# Altium PCB Acoustic Signal Localization PCB.PcbDoc
Units mm, origin at the board's own origin, x right, y up, seen from the top; angles counter-clockwise.
Board outline 100 x 100 mm, 2 copper layers (Top Layer, Bottom Layer); 55 components, 31 nets, 145 pads, 102 vias.
Unrouted connection lines stored in the file: 1.
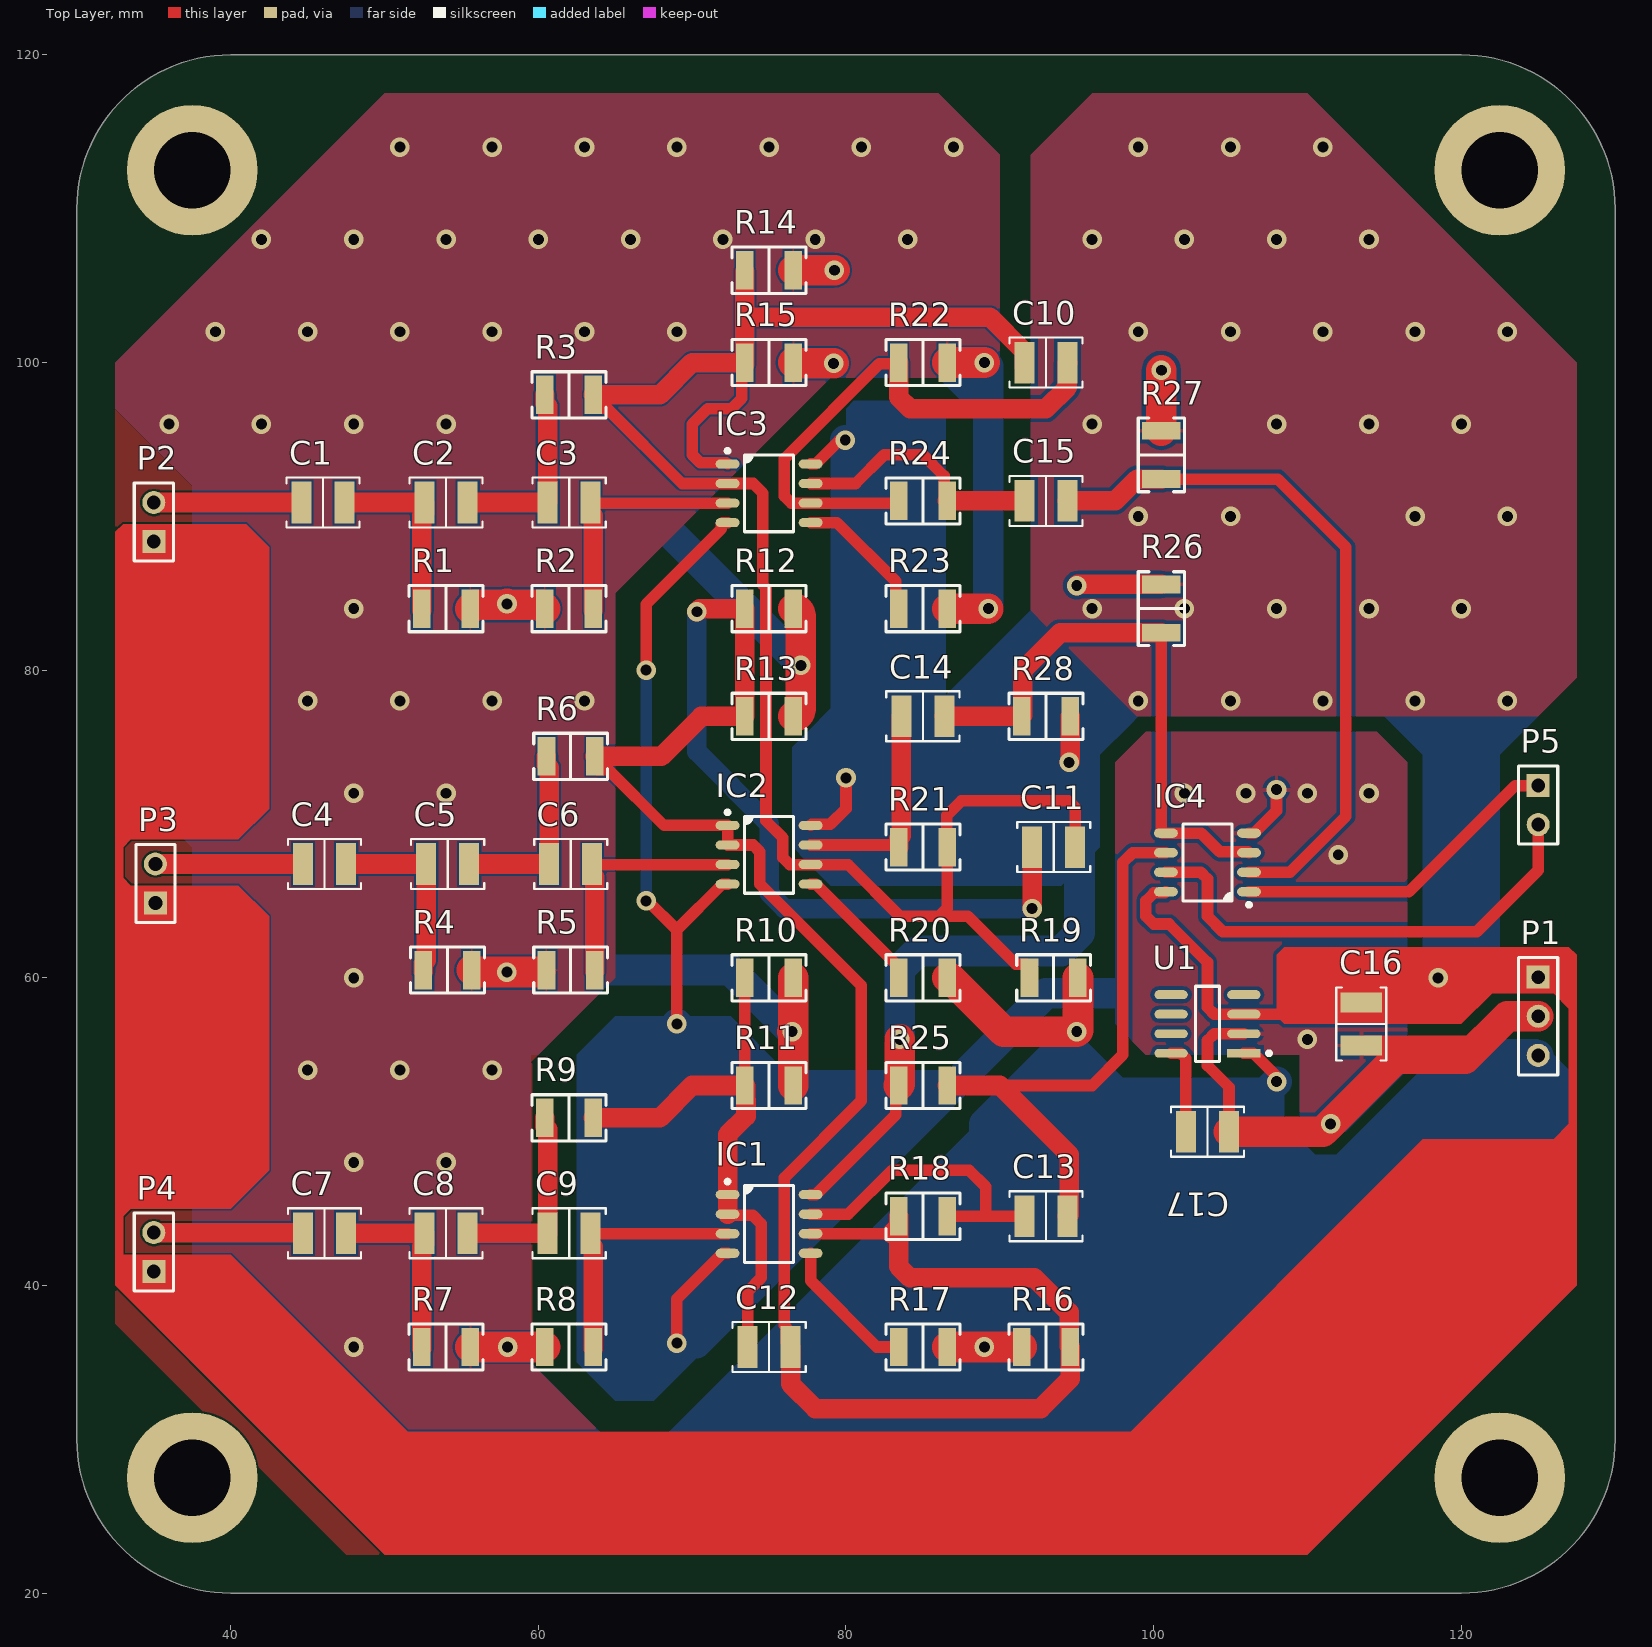
[diagram p0: Top Layer view]
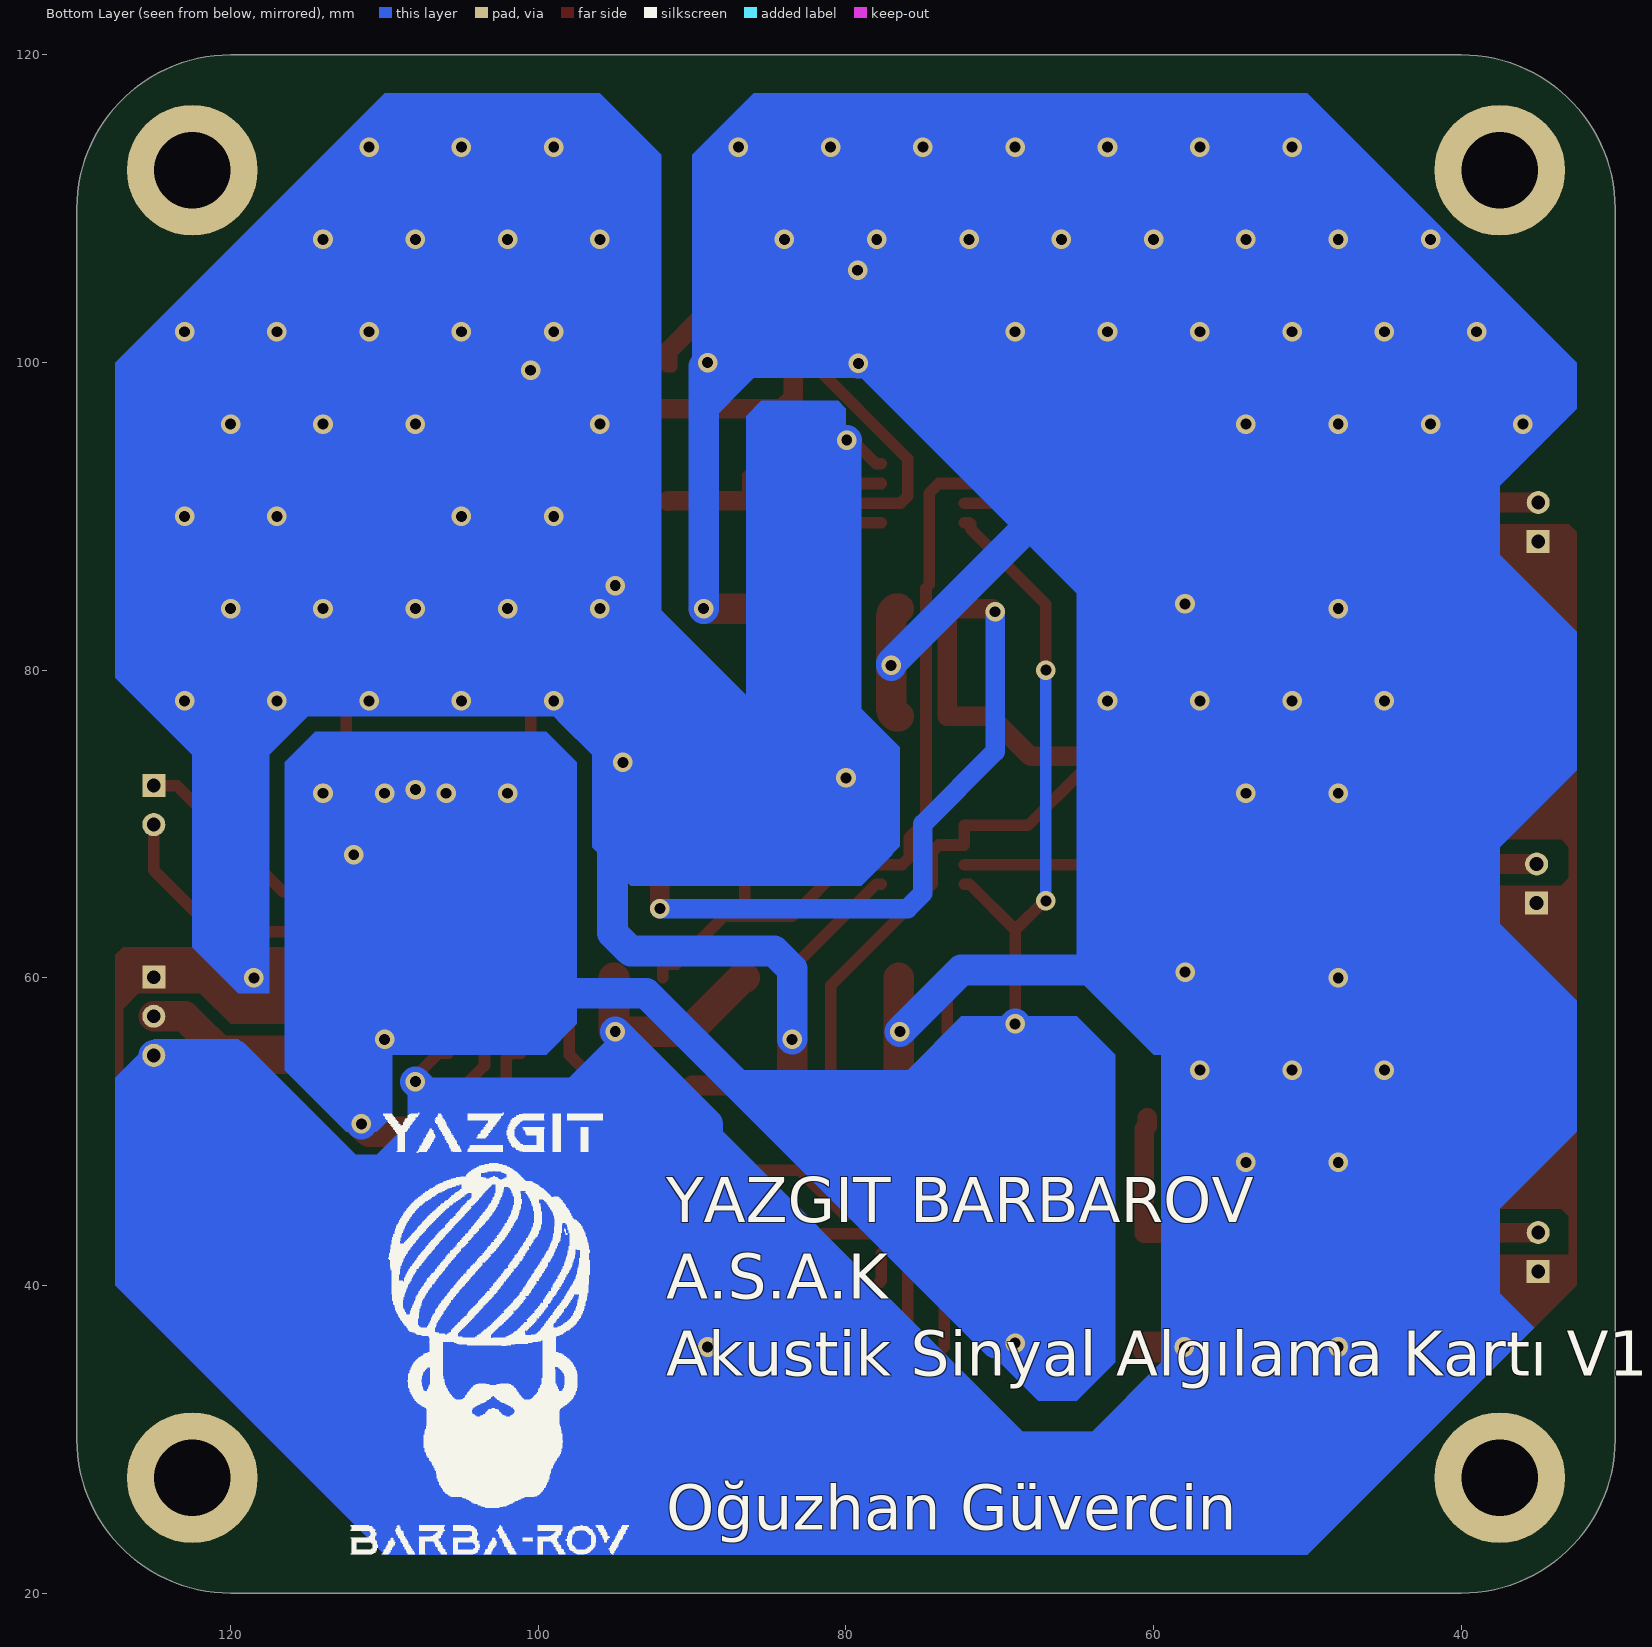
[diagram p1: Bottom Layer view, seen from below]
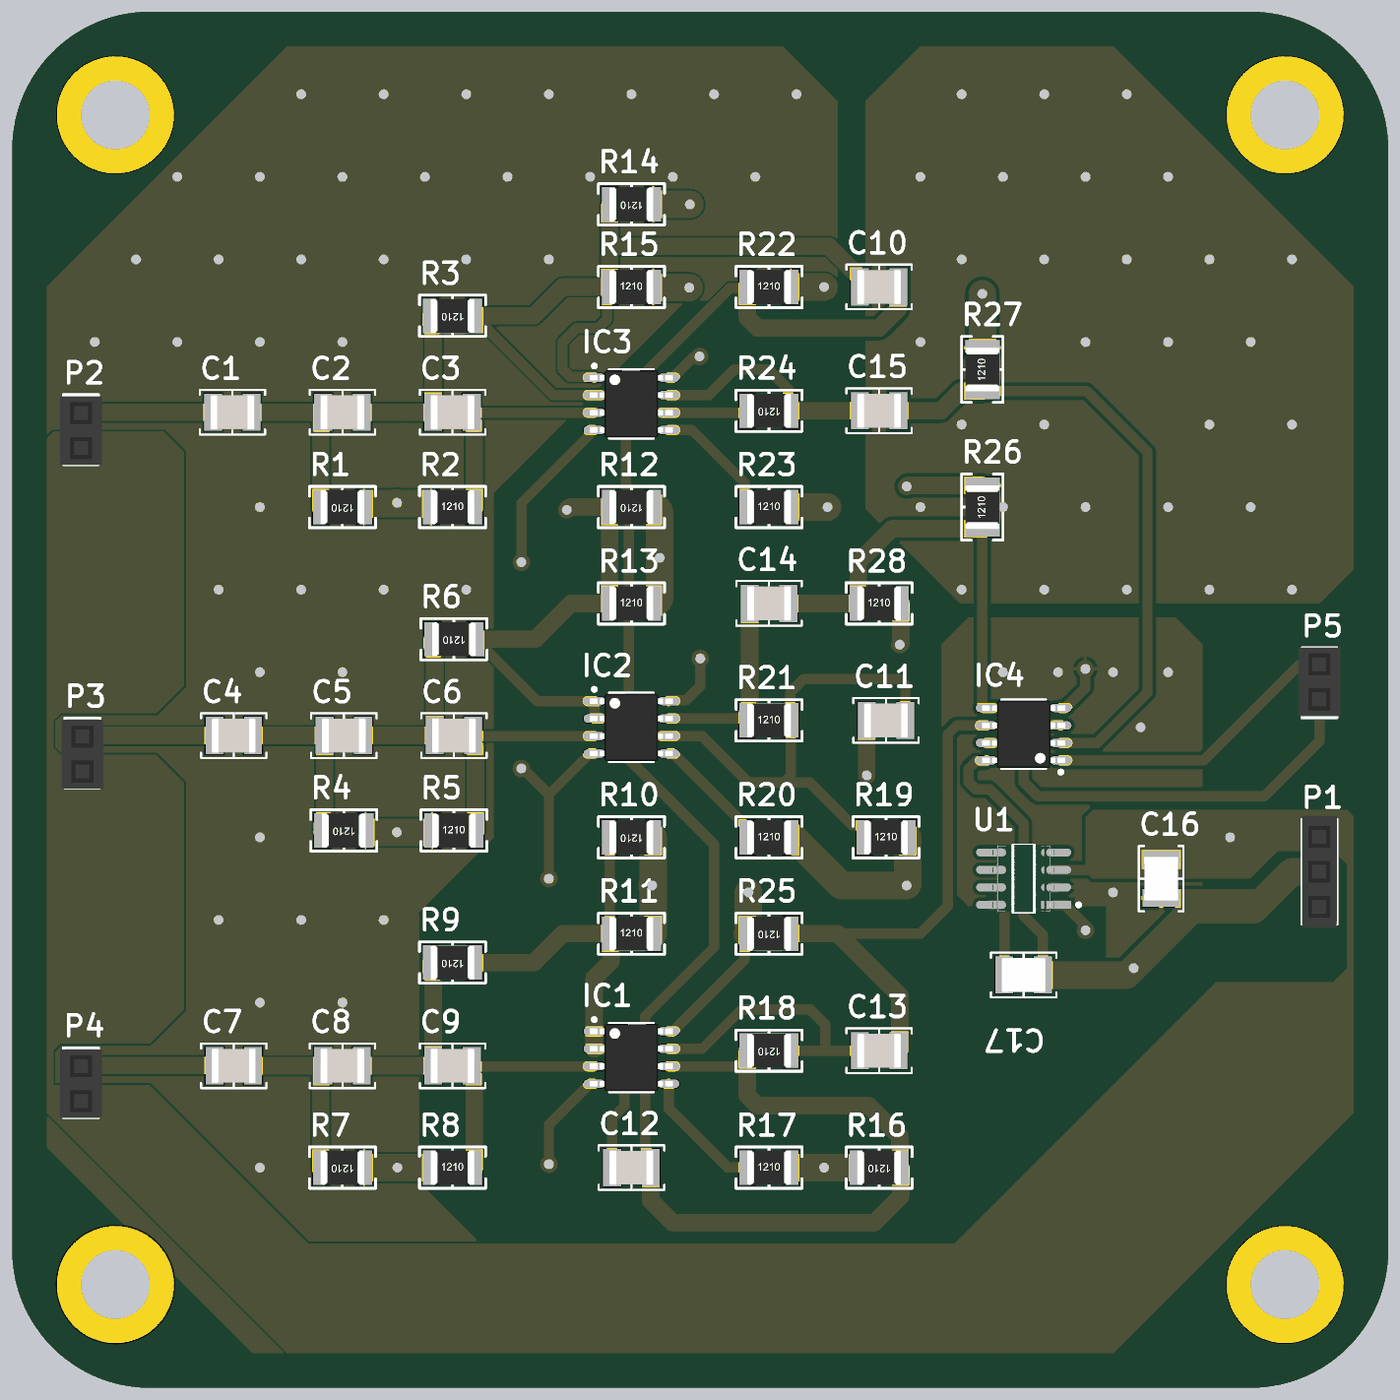
[diagram p2: 3D render of the assembled board from above, using the file's embedded part models]

## Layer stack, top to bottom
Top Solder: solder mask 0.0102, Solder Resist, Dk 3.5
Top Layer: signal copper 0.0356
Dielectric 1: dielectric 0.32, FR-4, Dk 4.8
Bottom Layer: signal copper 0.0356
Bottom Solder: solder mask 0.0102, Solder Resist, Dk 3.5

## Board outline
30,30 30,110 cw(c40,110) 40,120 120,120 cw(c120,110) 130,110 130,30 cw(c120,30) 120,20 40,20 cw(c40,30)

## Design rules (kind name [scope] priority, off if disabled: settings)
BoardOutlineClearance [All] p1: gap=0.2 ignorepadtopadclearanceinfootprint=FALSE
Clearance [All] p1: gap=0.127 ignorepadtopadclearanceinfootprint=FALSE except(0.25: Arc-Hole Track-Hole SMDPad-Hole THPad-Hole Via-Hole Fill-Hole Poly-Hole Region-Hole Text-Hole)
ComponentClearance [All] p1: gap=0.127 collisioncheckmode=3 verticalgap=0.127 showdistances=TRUE
DiffPairsRouting [All] p1: maxlimit=0.254 minlimit=0.127 mostfreqgap=0.127 toplayer_minwidth=0.127 toplayer_maxwidth=25.4 toplayer_prefwidth=0.127 bottomlayer_minwidth=0.127 bottomlayer_maxwidth=25.4 bottomlayer_prefwidth=0.127 maxuncoupledlength=12.7
Height [All] p1: minheight=0 maxheight=1816.048 prefheight=12.7
HoleSize [All] p1: absolutevalues=TRUE maxlimit=6.3 minlimit=0.3 maxpercent=80.000 minpercent=20.000
HoleToHoleClearance [All] p1: gap=0.25 allowstackedmicrovias=FALSE
MinimumAnnularRing [All] p1: minimumring=0.076
MinimumSolderMaskSliver [All] p1: minsoldermaskwidth=0
PlaneClearance [All] p1: clearance=0.127
PlaneConnect PlaneConnectPowerPads [InPadClass('PowerPads')] p1: planeconnectstyle=Direct reliefexpansion=0.508 reliefentries=4 reliefconductorwidth=0.254 reliefairgap=0.254
PlaneConnect [All] p2: pad.planeconnectstyle=Relief pad.reliefexpansion=0.3 pad.reliefentries=4 pad.reliefconductorwidth=0.127 pad.reliefairgap=0.127 via.planeconnectstyle=Direct via.reliefexpansion=0.3 via.reliefentries=4 via.reliefconductorwidth=0.127 via.reliefairgap=0.127
PolygonConnect PolygonConnectPowerPads [All vs (InPadClass('PowerPads'))] p1: connectstyle=Direct reliefconductorwidth=0.254 reliefentries=4 polygonreliefangle="90 Angle" airgapwidth=0.254
PolygonConnect [All] p2: thpad.connectstyle=Relief thpad.reliefconductorwidth=0.127 thpad.reliefentries=4 thpad.polygonreliefangle="90 Angle" thpad.airgapwidth=0.127 smdpad.connectstyle=Relief smdpad.reliefconductorwidth=0.127 smdpad.reliefentries=4 smdpad.polygonreliefangle="90 Angle" smdpad.airgapwidth=0.127 via.connectstyle=Direct via.reliefconductorwidth=0.127 via.reliefentries=4 via.polygonreliefangle="90 Angle" via.airgapwidth=0.127
RoutingVias [All] p1: holewidth=0.3 width=0.6 viastyle="Through Hole" minholewidth=0.3 minwidth=0.6 maxholewidth=0.6 maxwidth=6.6
SilkToSilkClearance [All] p1: silktosilkclearance=0
SilkToSolderMaskClearance [IsPad] p1: minsilkscreentomaskgap=0.127 clearancetoexposedcopper=TRUE
SolderMaskExpansion "Tenting Vias" [IsVia] p1: expansion=0.102 istentingtop=TRUE
SolderMaskExpansion [All] p2: expansion=0.075 istentingtop=FALSE
Width [All] p1: maxlimit=25.4 minlimit=0.127 preferedwidth=0.127 minimp=50.000000 maximp=50.000000 favimp=50.000000
20 further rules are at their usual default settings.

## Components (designator, comment, footprint, x,y, rotation, side; value= is the part's Value field where it differs from the comment)
C1 "200pF" "CAP 1210_3225 - 1.6MM" 46,90.9 r0 top
C2 "68pF" "CAP 1210_3225 - 1.6MM" 54,90.9 r0 top
C3 "68pF" "CAP 1210_3225 - 1.6MM" 62,90.9 r0 top
C4 "200pF" "CAP 1210_3225 - 1.6MM" 46.1,67.4 r0 top
C5 "68pF" "CAP 1210_3225 - 1.6MM" 54.1,67.4 r0 top
C6 "68pF" "CAP 1210_3225 - 1.6MM" 62.1,67.4 r0 top
C7 "200pF" "CAP 1210_3225 - 1.6MM" 46.1,43.4 r0 top
C8 "68pF" "CAP 1210_3225 - 1.6MM" 54,43.4 r0 top
C9 "68pF" "CAP 1210_3225 - 1.6MM" 62,43.4 r0 top
C10 "100pF" "CAP 1210_3225 - 1.8MM" 93,100 r0 top
C11 "100pF" "CAP 1210_3225 - 1.8MM" 93.5,68.5 r0 top
C12 "100pF" "CAP 1210_3225 - 1.8MM" 75,36 r0 top
C13 "100pF" "CAP 1210_3225 - 1.8MM" 93,44.5 r0 top
C14 "100pF" "CAP 1210_3225 - 1.8MM" 85,77 r0 top
C15 "100pF" "CAP 1210_3225 - 1.8MM" 93,91 r0 top
C16 "220µF" "CAP 1210_3225 - 2.8MM" 113.5,57 r270 top
C17 "1µF" "CAP 1210_3225 - 2.8MM" 103.5,50 r180 top
IC1 "LM2904DR2G" "TI SOIC-8 D" 75,44 r0 top
IC2 "LM2904DR2G" "TI SOIC-8 D" 75,68 r0 top
IC3 "LM2904DR2G" "TI SOIC-8 D" 75,91.5 r0 top
IC4 "LM2904DR2G" "TI SOIC-8 D" 103.5,67.5 r180 top
P1 "POWER" HDR1X3 125,60.04 r270 top
P2 "RIGHT MIC" HDR1X2 35,88.36 r90 top
P3 "MIDDLE MIC" HDR1X2 35.1,64.86 r90 top
P4 "LEFT MIC" HDR1X2 35,40.9 r90 top
P5 "OUT" HDR1X2 125,72.5 r270 top
R1 "5.1 kOhms" "RES 1210_3225" 54,84 r180 top
R2 "470 kOhms" "RES 1210_3225" 62,84 r0 top
R3 "6.2 kOhms" "RES 1210_3225" 62,97.9 r180 top
R4 "5.1 kOhms" "RES 1210_3225" 54.1,60.5 r180 top
R5 "470 kOhms" "RES 1210_3225" 62.1,60.5 r0 top
R6 "6.2 kOhms" "RES 1210_3225" 62.1,74.4 r180 top
R7 "5.1 kOhms" "RES 1210_3225" 54,36 r180 top
R8 "470 kOhms" "RES 1210_3225" 62,36 r0 top
R9 "6.2 kOhms" "RES 1210_3225" 62,50.9 r180 top
R10 "100 kOhms" "RES 1210_3225" 75,60 r180 top
R11 "100 kOhms" "RES 1210_3225" 75,53 r0 top
R12 "100 kOhms" "RES 1210_3225" 75,84 r180 top
R13 "100 kOhms" "RES 1210_3225" 75,77 r0 top
R14 "100 kOhms" "RES 1210_3225" 75,106 r180 top
R15 "100 kOhms" "RES 1210_3225" 75,100 r0 top
R16 "100 kOhms" "RES 1210_3225" 93,36 r180 top
R17 "100 kOhms" "RES 1210_3225" 85,36 r0 top
R18 "1 MOhms" "RES 1210_3225" 85,44.5 r180 top
R19 "100 kOhms" "RES 1210_3225" 93.5,60 r0 top
R20 "100 kOhms" "RES 1210_3225" 85,60 r0 top
R21 "1 MOhms" "RES 1210_3225" 85,68.5 r0 top
R22 "100 kOhms" "RES 1210_3225" 85,100 r0 top
R23 "100 kOhms" "RES 1210_3225" 85,84 r0 top
R24 "1 MOhms" "RES 1210_3225" 85,91 r180 top
R25 "100 kOhms" "RES 1210_3225" 85,53 r180 top
R26 "100 kOhms" "RES 1210_3225" 100.5,84 r90 top
R27 "100 kOhms" "RES 1210_3225" 100.5,94 r90 top
R28 "100 kOhms" "RES 1210_3225" 93,77 r0 top
U1 "TLE2426ID" FP-D0008A-IPC_B 103.5,57 r180 top

## Footprints (in the part's own frame and the unit in brackets; to place one, negate y for a bottom-side part, rotate by r counter-clockwise, add the part's x,y. Pads: shape width x height; smd on the part's side, far side on the other; paste and mask are expansions set on the pad)
"CAP 1210_3225 - 1.6MM" [mm] "Chip Capacitor, 2-Leads, Body 3.20x2.50mm, IPC Medium Density"
  rect 1.3x2.7 smd: 1(-1.4,0) 2(1.4,0)
  silkscreen extent -2.37,-1.63 2.37,1.63, body extent -1.6,-1.25 1.6,1.25, height 1.6
"CAP 1210_3225 - 1.8MM" [mm] "Chip Capacitor, 2-Leads, Body 3.20x2.50mm, IPC Medium Density"
  rect 1.3x2.7 smd: 1(-1.4,0) 2(1.4,0)
  silkscreen extent -2.37,-1.63 2.37,1.63, body extent -1.6,-1.25 1.6,1.25, height 1.8
"CAP 1210_3225 - 2.8MM" [mm] "Chip Capacitor, 2-Leads, Body 3.20x2.50mm, IPC Medium Density"
  rect 1.3x2.7 smd: 1(-1.4,0) 2(1.4,0)
  silkscreen extent -2.37,-1.63 2.37,1.63, body extent -1.6,-1.25 1.6,1.25, height 2.8
FP-D0008A-IPC_B [mm]
  rect 2.169x0.582 smd paste+0 mask+0: 1(-2.364,1.905)
  rrect100% 2.169x0.582 smd paste+0 mask+0: 2(-2.364,0.635) 3(-2.364,-0.635) 4(-2.364,-1.905) 5(2.364,-1.905) 6(2.364,-0.635) 7(2.364,0.635) 8(2.364,1.905)
  silkscreen extent -4.12,-2.45 0.78,2.45, body extent -3.7,-2.7 3.7,2.7, height 0.25
HDR1X2 [mm] "Connector; Header; 2 Position"
  rect 1.5x1.5 hole 0.9: 1(0,0)
  round 1.5 hole 0.9: 2(2.54,0)
  silkscreen extent -1.27,-1.27 3.81,1.27, body extent -1.3,-1.52 3.7,1.52, height 8.5
HDR1X3 [mm] "Connector; Header; 3 Position"
  rect 1.5x1.5 hole 0.9: 1(0,0)
  round 1.5 hole 0.9: 2(2.54,0) 3(5.08,0)
  silkscreen extent -1.27,-1.27 6.35,1.27, body extent -1.52,-1.27 6.6,1.27, height 8.51
"RES 1210_3225" [mm] "Chip Resistor, 2-Leads, Body 3.1x2.6mm, IPC Medium Density"
  rect 1.15x2.5 smd: 1(-1.575,0) 2(1.575,0)
  silkscreen extent -2.4,-1.5 2.4,1.5, body extent -1.6,-1.25 1.6,1.25, height 0.7
"TI SOIC-8 D" [mm] "SOP, 8-Leads, Body 4.90x3.90mm, Pitch 1.27mm, IPC Medium Density"
  oval 1.55x0.6 smd: 1(-2.7,1.905) 2(-2.7,0.635) 3(-2.7,-0.635) 4(-2.7,-1.905) 5(2.7,-1.905) 6(2.7,-0.635) 7(2.7,0.635) 8(2.7,1.905)
  silkscreen extent -2.82,-2.5 1.6,2.88, body extent -3.01,-2.45 3.01,2.45, height 1.5

## Part data
C1 C4 C7: library part C1210X201JBGACAUTO, "CAP CER 1210 200PF 630V C0G 5% F", Device Package="1210 (3225 Metric)", Manufacturer=KEMET, Operating Temperature="-55°C ~ 125°C", Ratings=AEC-Q200, Supplier Part Number 1=399-16763-1-ND, Temperature Coefficient="C0G, NP0", Tolerance=±5%, Voltage - Rated=630V, Applications="Automotive, Boardflex Sensitive", Capacitance=200pF, ComponentLink1Description=Datasheet, ComponentLink1URL=https://api.kemet.com/component-edge/download/datasheet/C1210X201JBGACAUTO.pdf, ComponentLink2Description="DigiKey Link", ComponentLink2URL=http://digikey.com/product-detail/en/kemet/C1210X201JBGACAUTO/399-16763-1-ND/8110129, Features="Low ESL, Soft Termination, High Voltage", LastUpdated="2.09.2020 01:10:34", Lifecycle Status=Active, Minimum Order=1, Mounting Type="Surface Mount, MLCC", Package / Case="1210 (3225 Metric)", Packaging=TapeAndReel, Part Number=C1210X201JBGACAUTO, Part Status=Active, PartId=24877, Price=0.85, Series="SMD Auto C0G HV Flex", Size / Dimension="0.130\" L x 0.102\" W (3.30mm x 2.60mm)", Supplier 1=DigiKey, Thickness (Max)="0.057\" (1.45mm)"
C2 C3 C5 C6 C8 C9: library part C1210C681KGRACTU, "CAP CER 680PF 2KV X7R 1210", Capacitance=680pF, Device Package="1210 (3225 Metric)", Manufacturer=KEMET, Operating Temperature="-55°C ~ 125°C", Supplier Part Number 1=399-3441-1-ND, Temperature Coefficient=X7R, Tolerance=±10%, Voltage - Rated="2000V (2kV)", Applications="General Purpose", ComponentLink1Description=Datasheet, ComponentLink1URL=https://api.kemet.com/component-edge/download/datasheet/C1210C681KGRACTU.pdf, ComponentLink2Description="DigiKey Link", ComponentLink2URL=http://digikey.com/product-detail/en/kemet/C1210C681KGRACTU/399-3441-1-ND/721312, Features="Low ESL, High Voltage", LastUpdated="2.09.2020 01:10:34", Lifecycle Status=Active, Minimum Order=1, Mounting Type="Surface Mount, MLCC", Package / Case="1210 (3225 Metric)", Packaging=TapeAndReel, Part Number=C1210C681KGRACTU, Part Status=Active, PartId=24867, Price=0.23, Series="SMD Comm X7R HV", Size / Dimension="0.126\" L x 0.098\" W (3.20mm x 2.50mm)", Supplier 1=DigiKey, Thickness (Max)="0.061\" (1.55mm)"
C10 C11 C12 C13 C14 C15: library part VJ1210A101JXGAT5Z, "CAP CER 100PF 1KV C0G/NP0 1210", Device Package="1210 (3225 Metric)", Manufacturer="Vishay Vitramon", Operating Temperature="-55°C ~ 125°C", Supplier Part Number 1=720-1035-1-ND, Temperature Coefficient="C0G, NP0", Tolerance=±5%, Voltage - Rated="1000V (1kV)", Applications="General Purpose", Capacitance=100pF, ComponentLink1Description=Datasheet, ComponentLink1URL=http://www.vishay.com/docs/45197/vjhvarcguard.pdf, ComponentLink2Description="DigiKey Link", ComponentLink2URL=http://digikey.com/product-detail/en/vishay-vitramon/VJ1210A101JXGAT5Z/720-1035-1-ND/1560037, Features="High Voltage", LastUpdated="2.09.2020 01:10:36", Lifecycle Status=Active, Minimum Order=1, Mounting Type="Surface Mount, MLCC", Package / Case="1210 (3225 Metric)", Packaging=TapeAndReel, Part Number=VJ1210A101JXGAT5Z, Part Status=Active, PartId=24731, Price=0.42, Series="VJ HVArc Guard™", Size / Dimension="0.126\" L x 0.098\" W (3.20mm x 2.50mm)", Supplier 1=DigiKey, Thickness (Max)="0.067\" (1.70mm)"
C16: library part GRM32EC80E227ME05L, "CAP CER 220UF 2.5V X6S 1210", Device Package="1210 (3225 Metric)", Manufacturer="Murata Electronics", Operating Temperature="-55°C ~ 105°C", Supplier Part Number 1=490-13971-1-ND, Temperature Coefficient=X6S, Tolerance=±20%, Voltage - Rated=2.5V, Applications="General Purpose", Capacitance=220µF, ComponentLink1Description=Datasheet, ComponentLink1URL=https://search.murata.co.jp/Ceramy/image/img/A01X/G101/ENG/GRM32EC80E227ME05-01.pdf, ComponentLink2Description="DigiKey Link", ComponentLink2URL=http://digikey.com/product-detail/en/murata-electronics/GRM32EC80E227ME05L/490-13971-1-ND/6155801, LastUpdated="2.09.2020 01:10:53", Lifecycle Status=Active, Minimum Order=1, Mounting Type="Surface Mount, MLCC", Package / Case="1210 (3225 Metric)", Packaging=TapeAndReel, Part Number=GRM32EC80E227ME05L, Part Status=Active, PartId=23666, Price=0.72, Series=GRM, Size / Dimension="0.126\" L x 0.098\" W (3.20mm x 2.50mm)", Supplier 1=DigiKey, Thickness (Max)="0.110\" (2.80mm)"
C17: library part CL32B105KCJNNNE, "CAP CER 1UF 100V X7R 1210", Device Package="1210 (3225 Metric)", Manufacturer="Samsung Electro-Mechanics", Operating Temperature="-55°C ~ 125°C", Supplier Part Number 1=1276-1812-1-ND, Temperature Coefficient=X7R, Tolerance=±10%, Voltage - Rated=100V, Applications="General Purpose", Capacitance=1µF, ComponentLink1Description=Datasheet, ComponentLink1URL=http://www.samsungsem.com/kr/support/product-search/mlcc/CL32B105KCJNNNE.jsp, ComponentLink2Description="DigiKey Link", ComponentLink2URL=http://digikey.com/product-detail/en/samsung-electro-mechanics/CL32B105KCJNNNE/1276-1812-1-ND/3889898, LastUpdated="2.09.2020 01:10:53", Lifecycle Status=Active, Minimum Order=1, Mounting Type="Surface Mount, MLCC", Package / Case="1210 (3225 Metric)", Packaging=TapeAndReel, Part Number=CL32B105KCJNNNE, Part Status=Active, PartId=23662, Price=0.14, Series=CL, Size / Dimension="0.126\" L x 0.098\" W (3.20mm x 2.50mm)", Supplier 1=DigiKey, Thickness (Max)="0.106\" (2.70mm)"
IC1 IC2 IC3 IC4: "IC OPAMP GP 2 CIRCUIT 8SOIC", Current - Output / Channel=40mA, Current - Supply=1.5mA, Current - Input Bias=45nA, Device Package="8-SOIC (0.154\", 3.90mm Width)", Manufacturer="ON Semiconductor", Operating Temperature="-40°C ~ 105°C", Supplier Device Package=8-SOIC, Supplier Part Number 1=LM2904DR2GOSCT-ND, Voltage - Supply, Single/Dual (±)="3V ~ 32V, ±1.5V ~ 16V", Voltage - Input Offset=2mV, Amplifier Type="General Purpose", ComponentLink1Description=Datasheet, ComponentLink1URL=http://www.onsemi.com/pub/Collateral/LM358-D.PDF, ComponentLink2Description="DigiKey Link", ComponentLink2URL=http://digikey.com/product-detail/en/on-semiconductor/LM2904DR2G/LM2904DR2GOSCT-ND/917932, Gain Bandwidth Product=1MHz, LastUpdated="9.01.2020 02:06:42", Lifecycle Status=Active, Minimum Order=1, Mounting Type="Surface Mount", Number of Circuits=2, Package / Case="8-SOIC (0.154\", 3.90mm Width)", Packaging=ReReel, Part Number=LM2904DR2G, Part Status=Active, PartId=15, Price=0.00, Series=-, Slew Rate=0.6V/µs, Supplier 1=DigiKey
P1: library part "Header 3", "Header, 3-Pin", LatestRevisionDate=17-Jul-2002, LatestRevisionNote="Re-released for DXP Platform.", Publisher="Altium Limited"
P2 P3 P4 P5: library part "Header 2", "Header, 2-Pin", LatestRevisionDate=17-Jul-2002, LatestRevisionNote="Re-released for DXP Platform.", Publisher="Altium Limited"
R1 R4 R7: library part RK73B2ETTD512J, "RES 5.1K OHM 5% 1/2W 1210", Device Package="1210 (3225 Metric)", Manufacturer="KOA Speer Electronics, Inc.", Operating Temperature="-55°C ~ 155°C", Power (Watts)="0.5W, 1/2W", Ratings=AEC-Q200, Supplier Device Package=1210, Supplier Part Number 1=2019-RK73B2ETTD512JCT-ND, Temperature Coefficient=±200ppm/°C, Tolerance=±5%, ComponentLink1Description=Datasheet, ComponentLink1URL=http://www.koaspeer.com/catimages/Products/RK73B/RK73B.pdf, ComponentLink2Description="DigiKey Link", ComponentLink2URL=http://digikey.com/product-detail/en/koa-speer-electronics-inc/RK73B2ETTD512J/2019-RK73B2ETTD512JCT-ND/10315189, Composition="Thick Film", Features="Automotive AEC-Q200, Moisture Resistant", Height - Seated (Max)="0.028\" (0.70mm)", LastUpdated="2.09.2020 01:26:17", Lifecycle Status=Active, Minimum Order=1, Number of Terminations=2, Package / Case="1210 (3225 Metric)", Packaging=TapeAndReel, Part Number=RK73B2ETTD512J, Part Status=Active, Price=0.02, Resistance="5.1 kOhms", Series=RK73B, Size / Dimension="0.126\" L x 0.063\" W (3.20mm x 1.60mm)", Supplier 1=DigiKey
R2 R5 R8: library part RMCF1210JT470K, "RES 470K OHM 5% 1/3W 1210", Device Package="1210 (3225 Metric)", Manufacturer="Stackpole Electronics Inc", Operating Temperature="-55°C ~ 155°C", Power (Watts)="0.333W, 1/3W", Ratings=AEC-Q200, Supplier Device Package=1210, Supplier Part Number 1=RMCF1210JT470KCT-ND, Temperature Coefficient=±200ppm/°C, Tolerance=±5%, ComponentLink1Description=Datasheet, ComponentLink1URL=https://www.seielect.com/catalog/sei-rmcf_rmcp.pdf, ComponentLink2Description="DigiKey Link", ComponentLink2URL=http://digikey.com/product-detail/en/stackpole-electronics-inc/RMCF1210JT470K/RMCF1210JT470KCT-ND/6053332, Composition="Thick Film", Features="Automotive AEC-Q200", Height - Seated (Max)="0.028\" (0.70mm)", LastUpdated="2.09.2020 01:26:20", Lifecycle Status=Active, Minimum Order=1, Number of Terminations=2, Package / Case="1210 (3225 Metric)", Packaging=TapeAndReel, Part Number=RMCF1210JT470K, Part Status=Active, Price=0.01, Resistance="470 kOhms", Series=RMCF, Size / Dimension="0.126\" L x 0.098\" W (3.20mm x 2.50mm)", Supplier 1=DigiKey
R3 R6 R9: library part RK73B2ETTD622J, "RES 6.2K OHM 5% 1/2W 1210", Device Package="1210 (3225 Metric)", Manufacturer="KOA Speer Electronics, Inc.", Operating Temperature="-55°C ~ 155°C", Power (Watts)="0.5W, 1/2W", Ratings=AEC-Q200, Supplier Device Package=1210, Supplier Part Number 1=2019-RK73B2ETTD622JCT-ND, Temperature Coefficient=±200ppm/°C, Tolerance=±5%, ComponentLink1Description=Datasheet, ComponentLink1URL=http://www.koaspeer.com/catimages/Products/RK73B/RK73B.pdf, ComponentLink2Description="DigiKey Link", ComponentLink2URL=http://digikey.com/product-detail/en/koa-speer-electronics-inc/RK73B2ETTD622J/2019-RK73B2ETTD622JCT-ND/10315057, Composition="Thick Film", Features="Automotive AEC-Q200, Moisture Resistant", Height - Seated (Max)="0.028\" (0.70mm)", LastUpdated="2.09.2020 01:26:20", Lifecycle Status=Active, Minimum Order=1, Number of Terminations=2, Package / Case="1210 (3225 Metric)", Packaging=TapeAndReel, Part Number=RK73B2ETTD622J, Part Status=Active, Price=0.02, Resistance="6.2 kOhms", Series=RK73B, Size / Dimension="0.126\" L x 0.063\" W (3.20mm x 1.60mm)", Supplier 1=DigiKey
R10 R11 R12 R13 R14 R15 R16 R17 R19 R20 R22 R23 R25 R26 R27 R28: library part RMCF1210FT100K, "RES 100K OHM 1% 1/3W 1210", Device Package="1210 (3225 Metric)", Manufacturer="Stackpole Electronics Inc", Operating Temperature="-55°C ~ 155°C", Power (Watts)="0.333W, 1/3W", Ratings=AEC-Q200, Supplier Device Package=1210, Supplier Part Number 1=RMCF1210FT100KCT-ND, Temperature Coefficient=±100ppm/°C, Tolerance=±1%, ComponentLink1Description=Datasheet, ComponentLink1URL=https://www.seielect.com/catalog/sei-packaging.pdf, ComponentLink2Description="DigiKey Link", ComponentLink2URL=http://digikey.com/product-detail/en/stackpole-electronics-inc/RMCF1210FT100K/RMCF1210FT100KCT-ND/1942841, Composition="Thick Film", Features="Automotive AEC-Q200", Height - Seated (Max)="0.028\" (0.70mm)", LastUpdated="2.09.2020 01:26:17", Lifecycle Status=Active, Minimum Order=1, Number of Terminations=2, Package / Case="1210 (3225 Metric)", Packaging=TapeAndReel, Part Number=RMCF1210FT100K, Part Status=Active, Price=0.02, Resistance="100 kOhms", Series=RMCF, Size / Dimension="0.126\" L x 0.098\" W (3.20mm x 2.50mm)", Supplier 1=DigiKey
R18 R21 R24: library part RK73B2ETTD105J, "RES 1M OHM 5% 1/2W 1210", Device Package="1210 (3225 Metric)", Manufacturer="KOA Speer Electronics, Inc.", Operating Temperature="-55°C ~ 155°C", Power (Watts)="0.5W, 1/2W", Ratings=AEC-Q200, Supplier Device Package=1210, Supplier Part Number 1=2019-RK73B2ETTD105JCT-ND, Temperature Coefficient=±200ppm/°C, Tolerance=±5%, ComponentLink1Description=Datasheet, ComponentLink1URL=http://www.koaspeer.com/catimages/Products/RK73B/RK73B.pdf, ComponentLink2Description="DigiKey Link", ComponentLink2URL=http://digikey.com/product-detail/en/koa-speer-electronics-inc/RK73B2ETTD105J/2019-RK73B2ETTD105JCT-ND/10315127, Composition="Thick Film", Features="Automotive AEC-Q200, Moisture Resistant", Height - Seated (Max)="0.028\" (0.70mm)", LastUpdated="2.09.2020 01:26:17", Lifecycle Status=Active, Minimum Order=1, Number of Terminations=2, Package / Case="1210 (3225 Metric)", Packaging=TapeAndReel, Part Number=RK73B2ETTD105J, Part Status=Active, Price=0.02, Resistance="1 MOhms", Series=RK73B, Size / Dimension="0.126\" L x 0.063\" W (3.20mm x 1.60mm)", Supplier 1=DigiKey
U1: library part CMP-04916-000027-1, "IC VREF GND REF 20V 1% 8SOIC", Case/Package=SOIC, Max Operating Temperature=125°C, Max Output Current=20mA, Max Output Voltage=20V, Max Input Voltage=40V, Min Operating Temperature=-55°C, Min Output Voltage=2V, Min Input Voltage=4V, Operating Supply Current=400uA, Package Quantity=75, Temperature Coefficient=35ppm/°C, Tolerance=1%, Height=1.58mm, Lead Free="Lead Free", Length=4.9mm, Mount="Surface Mount", Number of Channels=1, Number of Pins=8, Output Current=20mA, Output Type=Adjustable, Output Voltage=20V, Packaging=Rail/Tube, Radiation Hardening=No, REACH SVHC="No SVHC", Reference Type="Ground Reference (Virtual)", Reference Voltage=20V, RoHS Compliant=Yes, Series=-, Weight=0.002677oz, Width=3.91mm

## Free pads (board coordinates)
  round 8.5 hole 5 paste+0 mask+0.102: 1(37.5,27.5)
  round 8.5 hole 5: 2(37.5,112.5) 4(122.5,27.5) 5(122.5,112.5)

## Via types
v1: diameter 1.27, hole 0.711, Top Layer to Bottom Layer, tented both sides, 102 vias

## Nets (pads, with @x,y where several pads share a name; then routed paths per layer and width w, separated by ;. In a path a pad name is that pad's centre, name@x,y a point inside that pad or via, vN(x,y) a via of type N, cw(c..) or ccw(c..) an arc to the next point about the centre after c; other vN are vias at no path point)
+12: C16.1 IC1.8 IC2.8 IC3.8 IC4.8 P1.1 P2.1 P3.1 P4.1 R25.2 R26.2 R27.2 R28.2 U1.3 | length 196.4
  Top Layer w0.75: IC1.8 78.025,45.905 83.225,51.105 83.225,52.8 R25.2 ; IC2.8 77.775,69.98 78.98,69.98 80,71 v1(80,73) ; IC3.8 78.025,93.405 79.521,94.901 79.901,94.901 v1(79.95,94.95) ; IC4.8 100.725,65.52 100.02,65.52 99.5,65 99.5,64 100,63.5 101,63.5 103.5,61 103.5,58.074 103.939,57.635 U1.3 112.035,57.635 112.8,58.4 C16.1
  Top Layer w1.27: v1(94.5,74) 94.575,74.075 R28.2 ; v1(95,85.5) 95.075,85.575 R26.2
  Top Layer w2: R25.2 83.5,53.075 v1(83.5,56) ; R27.2 v1(100.5,99.5)
  Bottom Layer w2: v1(79.95,94.95) 80,94.901 v1(80,73) 82.5,73 ; v1(83.5,56) 83.5,60.578 84.672,61.75 94,61.75 95.172,62.922 95.172,72.328 94.5,73 v1(94.5,74) ; v1(100.5,99.5) 100.5,91 v1(95,85.5) 82.5,73 ; v1(118.5,60) 118.5,76.828 117.328,78 98.5,78 v1(94.5,74) ; 82.5,73 93.5,73 v1(94.5,74)
  other v1: 99,78 105,78 111,78 117,78 123,78 96,84 102,84 108,84 114,84 120,84 99,90 105,90 117,90 123,90 96,96 108,96 114,96 120,96 99,102 105,102 111,102 117,102 123,102 96,108 102,108 108,108 114,108 99,114 105,114 111,114
-12: C16.2 C17.1 IC1.4 IC2.4 IC3.4 IC4.4 P1.2 U1.2 | length 187.2
  Top Layer w0.75: v1(67,65) 67.12,65 69,63.12 ; v1(67,80) 67,84.295 71.9,89.195 71.9,89.52 71.975,89.595 IC3.4 ; v1(69,36.25) 69,39.12 71.975,42.095 IC1.4 ; v1(69,57) 69,63.12 ; IC2.4 71.975,66.095 69,63.12 ; C17.1 104.9,52.898 103.5,54.298 103.5,55.926 103.939,56.365 U1.2 ; IC4.4 106.525,69.405 107.987,70.867 v1(107.987,72.239)
  Top Layer w1.27: C16.2 120.6,55.6
  Top Layer w2: C17.1 111,50 v1(111.5,50.5) 115.75,54.75 120.25,54.75 123,57.5 P1.2
  Bottom Layer w0.75: v1(67,65) v1(67,80)
  Bottom Layer w2: v1(69,57) 69.5,56.5 69.5,36.75 v1(69,36.25) 70.25,36.25 93,59 111.5,59 ; v1(107.987,72.239) 111.5,68.726 111.5,59 ; v1(111.5,50.5) 111.5,59
  other v1: 110,56 112,68 102,72 106,72 110,72 114,72
GND: P1.3 R1.1 R2.1 R4.1 R5.1 R7.1 R8.1 R10.1 R11.2 R12.1 R13.2 R14.1 R15.2 R16.2 R17.2 R19.2 R20.2 R22.2 R23.2 U1.1 | length 280.9
  Top Layer w0.75: U1.1 106.489,55.095 108,53.584 v1(108,53.25)
  Top Layer w2: R7.1 v1(58,36) R8.1 ; R1.1 55.825,84.25 57.9,84.25 v1(57.963,84.313) 58.025,84.25 60.175,84.25 R2.1 ; R4.1 55.8,60.375 v1(57.95,60.375) R5.1@60.1,60.375 ; R11.2 76.575,56.425 v1(76.5,56.5) 76.575,56.575 R10.1 ; R13.2 76.75,77 77,77.25 77,77.425 77.063,77.488 77.063,83.512 77,83.575 77,83.75 76.75,84 R12.1 ; R15.2 76.625,99.95 v1(79.2,99.95) ; R14.1 v1(79.25,106) ; R17.2 v1(89,36) R16.2 ; R20.2 86.75,60 90.25,56.5 v1(95,56.5) 95.075,56.575 R19.2 ; R23.2 v1(89.25,84) ; R22.2 v1(89,100)
  Bottom Layer w2: v1(58,36) 57.95,36.05 57.95,84.3 65.4,91.75 65.75,91.75 ; v1@58,60.425 58.075,60.5 72.5,60.5 v1(76.5,56.5) ; v1(77.063,80.313) 77.063,80.437 65.75,91.75 ; v1(79.25,106) v1@79.25,100 ; v1(89.25,84) 89.25,99.75 v1(89,100) v1@79.25,100 ; v1(95,56.5) 89,50.5 v1(89,36) 90.75,36 101.75,47 ; v1(108,53.25) 101.75,47 ; P1.3 119.71,54.96 111.75,47 101.75,47 ; 65.75,91.75 74,100 79.151,100 v1(79.2,99.95) v1@79.25,100
  other v1: 48,36 48,48 54,48 45,54 51,54 57,54 48,60 48,72 54,72 45,78 51,78 57,78 63,78 48,84 36,96 42,96 48,96 54,96 39,102 45,102 51,102 57,102 63,102 69,102 42,108 48,108 54,108 60,108 66,108 72,108 78,108 84,108 51,114 57,114 63,114 69,114 75,114 81,114 87,114
NetC1_1: C1.1 P2.2 | length 9.6
  Top Layer w1.27: P2.2 C1.1
NetC1_2: C1.2 C2.1 R1.2 | length 12.3
  Top Layer w1.27: C1.2 C2.1 52.6,90.2 52.425,90.025 R1.2@52.425,83.9
NetC2_2: C2.2 C3.1 R3.2 | length 12.3
  Top Layer w1.27: C2.2 C3.1 60.6,97.17 60.425,97.345 R3.2
NetC3_2: C3.2 IC3.3 R2.2 | length 16
  Top Layer w0.75: C3.2 63.435,90.865 IC3.3
  Top Layer w1.27: C3.2 63.4,90.2 63.575,90.025 R2.2 R2.2@63.575,83.9
NetC4_1: C4.1 P3.2 | length 9.6
  Top Layer w1.27: P3.2 C4.1
NetC4_2: C4.2 C5.1 R4.2 | length 12.3
  Top Layer w1.27: C4.2 C5.1 52.7,61.13 52.525,60.955 R4.2@52.525,60.4
NetC5_2: C5.2 C6.1 R6.2 | length 12.3
  Top Layer w1.27: C5.2 C6.1 60.7,73.67 60.525,73.845 R6.2
NetC6_2: C6.2 IC2.3 R5.2 | length 15.9
  Top Layer w0.75: C6.2 63.535,67.365 IC2.3
  Top Layer w1.27: C6.2 63.5,66.7 63.675,66.525 R5.2 R5.2@63.675,60.4
NetC7_1: C7.1 P4.2 | length 9.7
  Top Layer w1.27: P4.2 35.02,43.42 44.685,43.42 44.7,43.405 C7.1
NetC7_2: C7.2 C8.1 R7.2 | length 12.7
  Top Layer w1.27: C7.2 C8.1 52.6,42.7 52.425,42.525 R7.2@52.425,35.9
NetC8_2: C8.2 C9.1 R9.2 | length 12.8
  Top Layer w1.27: C8.2 C9.1 60.6,50.17 60.425,50.345 R9.2
NetC9_2: C9.2 IC1.3 R8.2 | length 16.5
  Top Layer w0.75: C9.2 63.435,43.365 IC1.3
  Top Layer w1.27: C9.2 63.4,42.7 63.575,42.525 R8.2 R8.2@63.575,35.9
NetC10_1: C10.1 C11.2 IC2.6 IC3.1 IC3.2 R3.1 R14.2 R15.1 R19.1 R21.2 | length 123.9
  Top Layer w0.75: R3.1 63.575,97.225 63.775,97.025 64.45,97.025 69.34,92.135 IC3.2 73.965,92.135 74.6,91.5 74.6,85.54 74.8,85.34 74.8,70.2 75.9,69.1 75.9,67.804 76.339,67.365 IC2.6 80.135,67.365 83.5,64 86.061,64 ; IC3.1 72.225,93.48 70.52,93.48 70,94 70,96 71,97 72.561,97 73.225,97.664 73.225,99.7 R15.1@73.425,99.9 ; C10.1@91.325,99.725 C10.1 ; R19.1 91.925,60.675 91.725,60.875 91.05,60.875 87.925,64 86.061,64 ; C11.2 94.9,71.061 94.461,71.5 87.5,71.5 86.555,70.555 86.555,68.48 86.575,68.46 86.575,64.514 86.061,64
  Top Layer w1.27: R3.1 67.9,97.9 70,100 73.365,100 R15.1@73.425,99.94 ; R15.1@73.425,99.9 R15.1@73.425,99.94 ; R14.2@73.425,105.9 73.425,102.95 ; C10.1 91.6,100.7 89.35,102.95 73.425,102.95 ; R15.1@73.425,99.94 R15.1 73.425,102.95
NetC10_2: C10.2 IC3.6 R22.1 R24.2 | length 35.8
  Top Layer w0.75: R24.2 83.29,90.865 IC3.6 76.439,90.865 76,91.304 76,93.75 82.164,99.914 83.339,99.914 R22.1
  Top Layer w1.27: R22.1 83.425,97.744 84.169,97 93,97 94.385,98.385 94.385,99.985 C10.2
NetC11_1: C11.1 C12.2 IC1.6 IC2.1 IC2.2 R6.1 R12.2 R13.1 R16.1 R18.2 | length 162.3
  Top Layer w0.75: R6.1 63.675,73.725 63.875,73.525 64.55,73.525 68.17,69.905 IC2.1 IC2.2 73.961,68.635 74.4,68.196 74.4,66.1 81,59.5 81,52 76,47 76,37.414 76.125,37.289 76.125,36.275 C12.2 ; IC1.6 R18.2@82.965,43.365
  Top Layer w1.27: R6.1 68,74.4 70.6,77 R13.1 R12.2 70.5,84 v1(70.3,83.8) ; C12.2 76.4,33.6 78,32 92.65,32 94.575,33.925 R16.1 94.515,36.06 94.515,37.072 94.5,37.087 94.5,38.25 92.25,40.5 84.169,40.5 83.425,41.244 R18.2@83.425,43.825 ; R18.2@82.965,43.365 R18.2@83.425,43.825 ; R18.2 R18.2@83.425,43.825 ; v1(92.1,64.5) C11.1
  Bottom Layer w1.27: v1(70.3,83.8) 70.3,74.7 75,70 75,65.5 76,64.5 v1(92.1,64.5)
NetC12_1: C12.1 IC1.1 IC1.2 R9.1 R10.2 R11.1 | length 37.4
  Top Layer w0.75: IC1.2 72.375,44.56 73.94,44.56 74.5,44 74.5,40.5 73.6,39.6 C12.1 ; R11.1 R10.2
  Top Layer w1.27: R9.1 67.9,50.9 70,53 R11.1 73.485,52.94 73.485,52.067 73.5,52.052 73.5,51 72.3,49.8 IC1.1 IC1.2
NetC13_1: C13.1 IC1.7 R18.1 | length 20
  Top Layer w0.75: IC1.7 80.135,44.635 83,47.5 88,47.5 89.088,46.413 89.088,44.5 ; R18.1 89.088,44.5 ; C13.1 89.088,44.5
NetC13_2: C13.2 IC4.6 R25.1 | length 38.2
  Top Layer w0.75: 90,53 96,53 98,55 98,67.5 98.635,68.135 IC4.6
  Top Layer w1.27: R25.1 90,53 94.5,48.5 94.5,44.6 C13.2
NetC14_1: C14.1 IC2.7 R21.1 | length 14.4
  Top Layer w0.75: IC2.7 83.29,68.635 R21.1
  Top Layer w1.27: R21.1 83.425,69.055 83.6,69.23 C14.1
NetC14_2: C14.2 IC4.3 IC4.5 R26.1 R28.1 | length 37.3
  Top Layer w0.75: R26.1 100.5,69.48 100.575,69.405 IC4.5 103.095,69.405 104.3,68.2 106.135,68.2 IC4.3
  Top Layer w1.27: C14.2 R28.1 91.485,77.06 91.485,79.985 93.925,82.425 R26.1
NetC15_1: C15.1 IC3.7 R24.1 | length 16.8
  Top Layer w0.75: IC3.7 80.618,92.135 82.483,94 85,94 86.375,92.625 86.375,91.2 R24.1
  Top Layer w1.27: R24.1 C15.1 91.6,90.99 C15.1@91.585,90.975
NetC15_2: C15.2 IC4.2 R27.1 | length 45.8
  Top Layer w0.75: R27.1 108.075,92.425 112.5,88 112.5,70.5 108.865,66.865 IC4.2
  Top Layer w1.27: C15.2 97.5,91 98.925,92.425 R27.1
NetC17_2: C17.2 U1.8 | length 5.9
  Top Layer w0.75: U1.8 101.762,55.095 102.1,54.757 C17.2
NetP5_1: IC4.1 P5.1 | length 21.7
  Top Layer w0.75: IC4.1 116.595,65.595 123.5,72.5 P5.1
NetP5_2: IC4.7 P5.2 | length 31.8
  Top Layer w0.75: IC4.7 103.061,66.865 103.5,66.426 103.5,64 104.5,63 121,63 125,67 P5.2
NetR17_1: IC1.5 R17.1 | length 9.3
  Top Layer w0.75: IC1.5 77.7,40.3 82,36 R17.1
NetR20_1: IC2.5 R20.1 | length 8.7
  Top Layer w0.75: IC2.5 78.025,66.095 83.225,60.895 83.225,60.2 R20.1
NetR23_1: IC3.5 R23.1 | length 9
  Top Layer w0.75: IC3.5 79.405,89.595 83.225,85.775 83.225,84.2 R23.1
pads on no net: U1.4 U1.5 U1.6 U1.7

## Polygon pours and split planes (outlines as drawn)
GND on Top Layer "GND_L01_P002" (solid, pour order 2): 32.5,100 32.5,37.5 47.5,22.5 56,22.5 64,30.5 59.65,34.85 59.6,34.85 59.6,54.4 59.5,54.5 65,60 65,85 79,99 90,99 90,113.5 86,117.5 50,117.5
+12 on Top Layer "+12_L01_P003" (solid, pour order 3): 92,113.5 96,117.5 110,117.5 127.5,100 127.5,79.5 125,77 98.888,77 92,83.888
-12 on Top Layer "-12_L01_P006" (solid, pour order 6): 97.5,74 99.5,76 114.5,76 116.5,74 116.5,54 112.5,50 110.5,50 109.5,51 109.5,55 99.5,55 97.5,57

## Other copper
Top Layer:
  region net +12: 50,22.5 110,22.5 127.5,40 127.5,61.5 127,62 126,59 127,58 127,50.5 126,49.5 117.5,49.5 98.5,30.5 42,30.5 42,33.554 42,30.5 51.5,30.5 42,40 42,35 42,40 40,42 33,42 33,44.5 33.5,45 40,45 42.5,47.5 42.5,64 40.5,66 33.5,66 33,66.5 33,68.5 33.5,69 40.5,69 42.5,71 42.5,88 41,89.5 33,89.5 32.5,89 32.5,40
  region net +12: 108,61.5 108.5,62 127,62 127.5,61.5 127.5,59.5 127,59 122,59 120,57 108.5,57 108,57.5
Bottom Layer:
  region net GND: 68.5,22.5 110,22.5 127.5,40 127.5,53.5 125,56 119.5,56 112,48.5 108.5,48.5 107.5,53.5 98,53.5 95,56.5 95,57 68.5,30.5 64,30.5 59.5,35 59.5,55 60,55 65,60 65,85 79,99 90,99 90,113.5 86,117.5 50,117.5 32.5,100 32.5,97 37.5,92 37.5,87.5 32.5,82.5 32.5,73.5 37.5,68.5 37.5,63.5 32.5,58.5 32.5,50 37.5,45 37.5,39.5 35.25,37.25 50,22.5 59.5,22.5
  region net +12: 77,68 79,66 94,66 96.5,68.5 96.5,74.5 98.5,76.5 99,77 115,77 117.5,74.5 117.5,59 119.5,59 122.5,62 122.5,74.5 127.5,79.5 127.5,100 110,117.5 96,117.5 92,113.5 92,83.888 86.5,78.163 86.5,96.5 85.5,97.5 80.5,97.5 80,97 80,78.5 76.5,75 76.5,68.565 77,68.065
  region net -12: 76,41 77.5,42.5 89,54 76,54 72.5,57.5 65,57.5 62.5,55 62.5,35 65,32.5 67.5,32.5 74.5,39.5
  region net -12: 112.5,50 116.5,54 116.5,74 114.5,76 99.5,76 97.5,74 97.5,57 99.5,55 109.5,55 109.5,51 110.5,50
  region net GND: 86,99 89,96 89,101 88.5,101.5 86,101.5
  region net GND: 106.5,53.5 107.5,53.5 108.5,52.5 108.5,50.5 110.5,48.5 109.5,47.5 106,47.5 106,53

## Silkscreen, mask and mechanical layers (free items; w line width, h text height)
Bottom Overlay:
  drawing of 23 lines, arcs and shapes, not listed
  text "YAZGIT BARBAROV / A.S.A.K / Akustik Sinyal Algılama Kartı V1.0 /  / Oğuzhan Güvercin" at 91.676,23.151 h5
Mechanical 1:
  lines w0.2: 40,20 cw(c40,30) 30,30 30,110 cw(c40,110) 40,120 120,120 ; 40,20 40,20 ; 40,20 120,20 ccw(c120,30) 130,30 130,110 ccw(c120,110) 120,120 ; 120,120 120,120